# EAGLE board Leiterplatte (EAGLE 9.7.0)
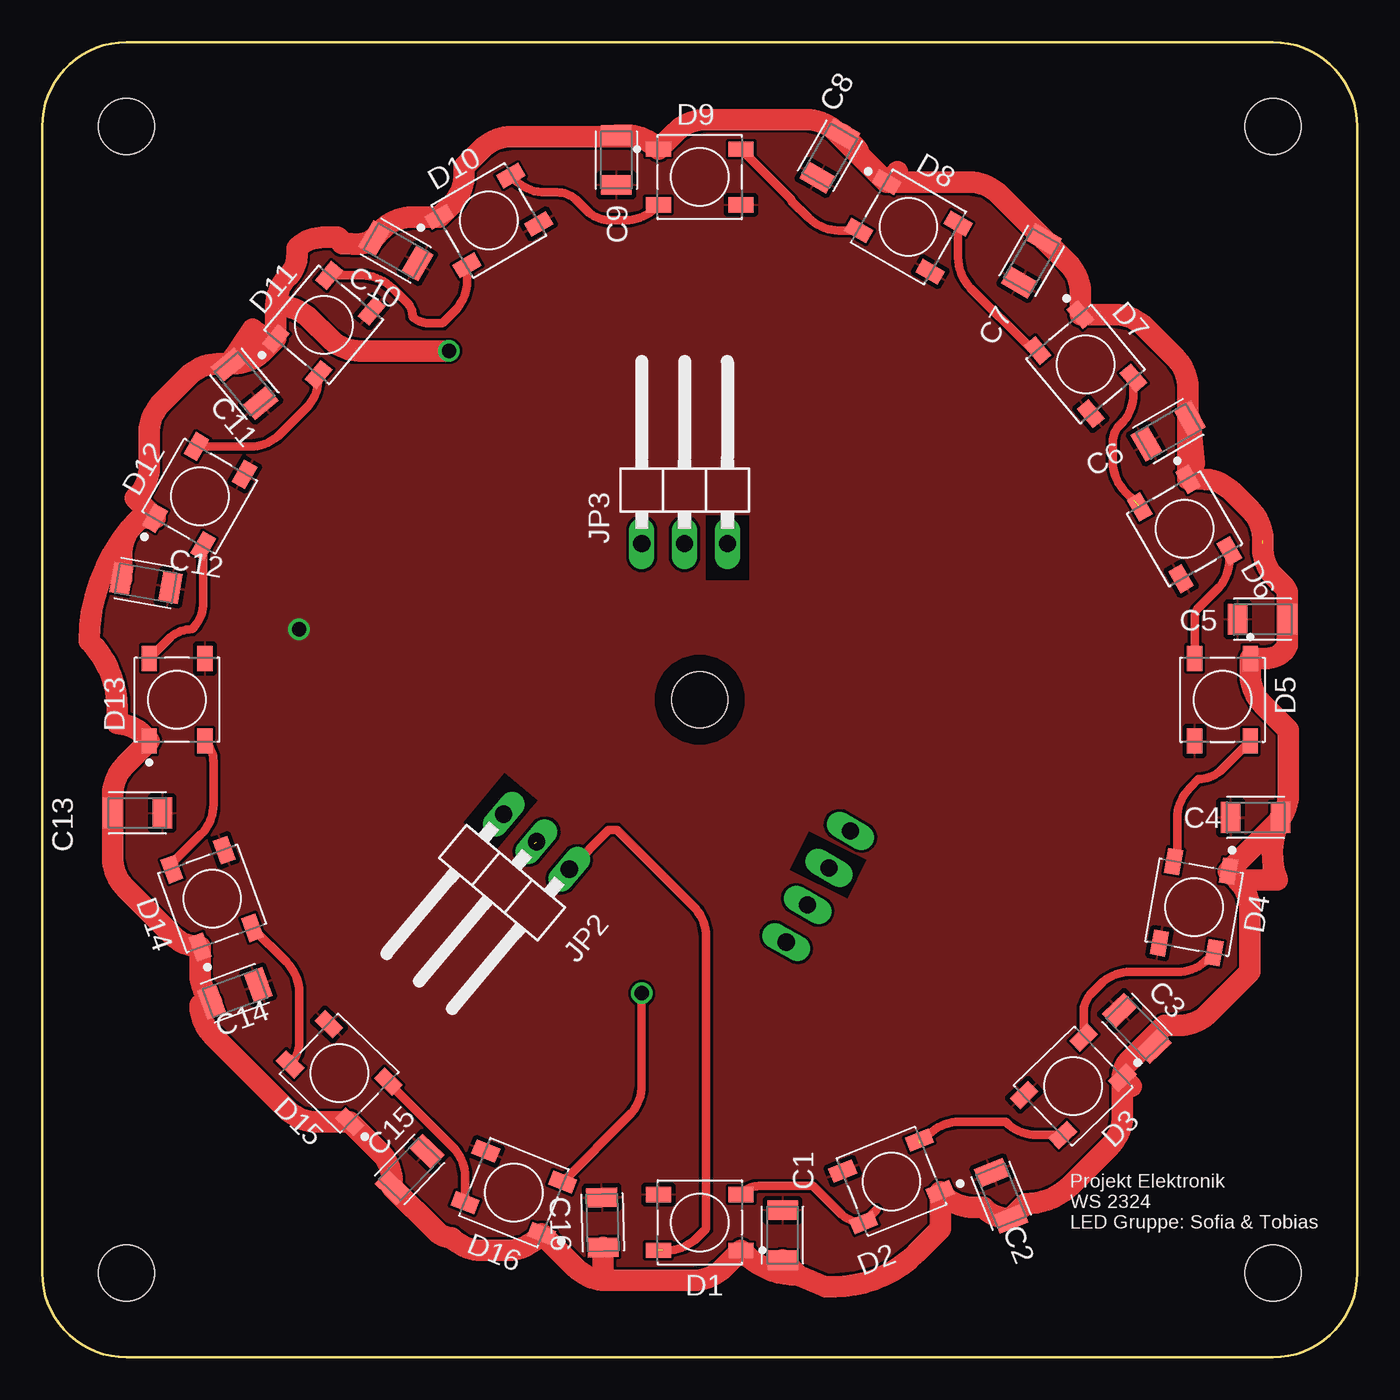
[diagram p0: board, top side]
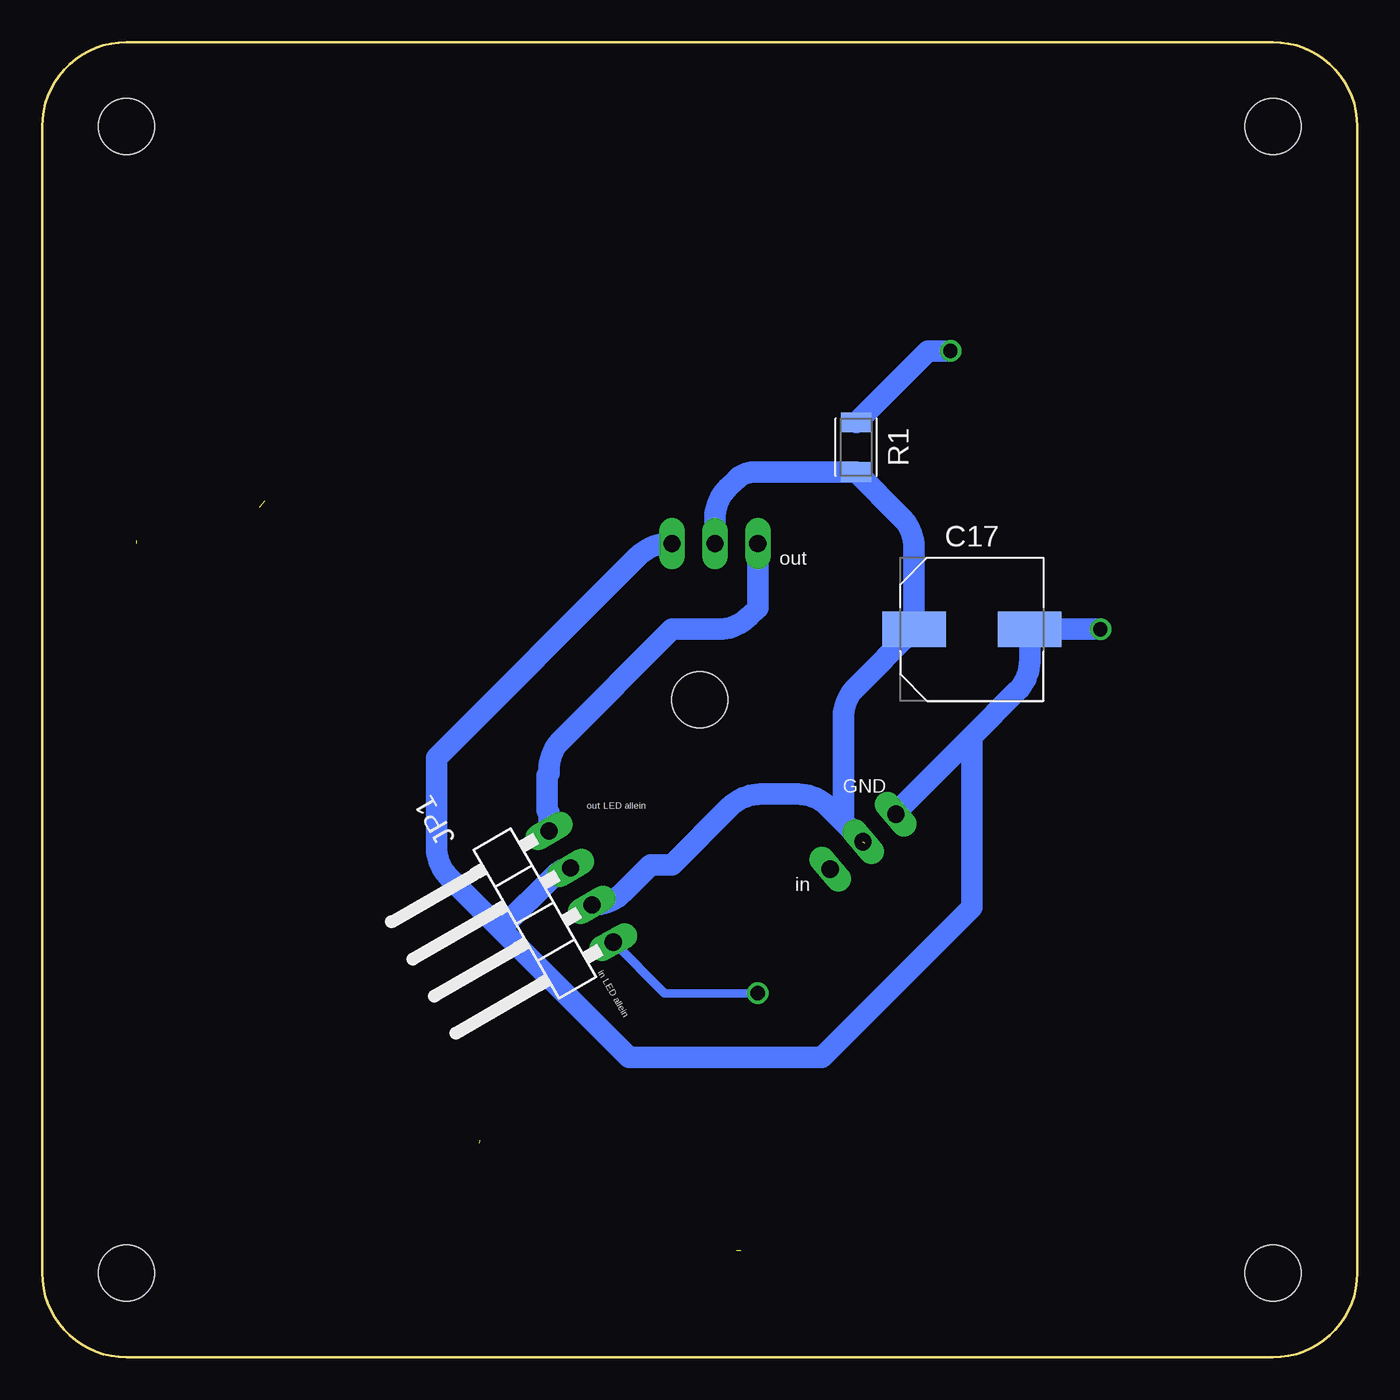
[diagram p1: board, bottom side, seen from below]

Size 78 x 78 mm. Coordinates in mm from the lower left corner, seen from the top.
Outline: 0,5 0,73 arc-90 5,78 73,78 arc-90 78,73 78,5 arc-90 73,0 5,0 arc-90 0,5
Copper layers (1*16): Top / Bottom
Stack-up Default Layer Stack: Top User Defined 0.035mm / Dielectric-1 User Defined 1.5mm / Bottom User Defined 0.035mm
Design rules: minimum drill size 0.35mm, minimum copper width 6mil, keepout clearance 0mil, drill distance 6mil, dimension clearance 40mil, restrict clearance 0mil, copper clearance wire_polygon to wire_polygon 6mil, copper clearance wire_polygon to pad_smd 6mil, copper clearance wire_polygon to via 6mil, copper clearance pad_smd to pad_smd 6mil, copper clearance pad_smd to via 6mil, copper clearance via to via 6mil, copper clearance smd to pad (same net) 6mil, copper clearance smd to via (same net) 6mil, copper clearance smd to smd (same net) 6mil
Holes 3.3 mm at 73,73 5,73 5,5 73,5 39,39
tRestrict: area 39.4,46.1 to 41.9,49.9; area 44.3,27.2 to 48.9,31.2; area 25,30.1 to 29.4,34.7

## Footprints (pad centres in the part's own frame; a part is rotated, then mirrored left to right if it is on the bottom)
CAPC3216X135 = smd 1.165 x 1.815: 1 -1.475,0; 2 1.475,0
CAPAE830X1050N = smd 3.764 x 2.115: 1 -3.426,0; 2 3.426,0
WS2812B = smd 1.5 x 0.9: 1 -2.45,1.65; 2 -2.45,-1.65; 3 2.45,-1.65; 4 2.45,1.65
1X04/90 = drill 1.016 long: 1 -3.81,-3.81; 2 -1.27,-3.81; 3 1.27,-3.81; 4 3.81,-3.81
1X03/90 = drill 1.016 long: 1 -2.54,-3.81; 2 0,-3.81; 3 2.54,-3.81
RESC3216X70 = smd 1.165 x 1.815: 1 -1.475,0; 2 1.475,0

## Placement (x,y rotation side)
C1  [CAPC3216X135]  43.91,7.25 270 top
C2  [CAPC3216X135]  56.88,9.59 292 top
C3  [CAPC3216X135]  64.93,19.51 314 top
C4  [CAPC3216X135]  71.96,32.02 0 top
C5  [CAPC3216X135]  72.38,43.77 0 top
C6  [CAPC3216X135]  66.79,54.93 30 top
C7  [CAPC3216X135]  58.67,65.02 60 top
C8  [CAPC3216X135]  46.72,71.26 60 top
C9  [CAPC3216X135]  34.05,71.01 90 top
C10  [CAPC3216X135]  20.98,65.63 150 top
C11  [CAPC3216X135]  12,57.74 310 top
C12  [CAPC3216X135]  6.16,45.92 350 top
C13  [CAPC3216X135]  5.65,32.28 0 top
C14  [CAPC3216X135]  11.43,21.59 20 top
C15  [CAPC3216X135]  21.78,11.15 46 top
C16  [CAPC3216X135]  33.23,8 91.6 top
C17  [CAPAE830X1050N]  22.86,43.18 0 bottom
D1  WS2812B  [WS2812B]  39,8 180 top
D2  WS2812B  [WS2812B]  50.37,10.43 202 top
D3  WS2812B  [WS2812B]  61.15,16.08 224 top
D4  WS2812B  [WS2812B]  68.31,26.7 260 top
D5  WS2812B  [WS2812B]  70,39 270 top
D6  WS2812B  [WS2812B]  67.75,49.13 300 top
D7  WS2812B  [WS2812B]  61.88,58.9 310 top
D8  WS2812B  [WS2812B]  51.38,67.04 330 top
D9  WS2812B  [WS2812B]  39,70 0 top
D10  WS2812B  [WS2812B]  26.49,67.43 30 top
D11  WS2812B  [WS2812B]  16.7,61.23 50 top
D12  WS2812B  [WS2812B]  9.35,51.07 60 top
D13  WS2812B  [WS2812B]  8,39 90 top
D14  WS2812B  [WS2812B]  10.08,27.21 110 top
D15  WS2812B  [WS2812B]  17.62,16.86 136 top
D16  WS2812B  [WS2812B]  27.97,9.78 158 top
JP1  PINHD-1X4/90  [1X04/90]  49.33,26.02 120 bottom
JP2  PINHD-1X3/90  [1X03/90]  26.87,27.66 140 top
JP3  PINHD-1X3/90  [1X03/90]  38.1,52.07 0 top
R1  [RESC3216X70]  29.72,53.98 270 bottom

## Library data of the parts
C1-C17 = Capacitor; CATEGORY: Capacitor
D1-D16 = LED; CATEGORY: LED; COLOR: RGB; DESCRIPTION: LED integrated light source; MANUFACTURER: Worldsemi; MPN: WS2812B; OPERATING_TEMP: -25 ℃ to +80℃(TJ); PART_STATUS: Active; SUB_CATEGORY: RGB
JP1 = Connector; CATEGORY: Headers; DESCRIPTION: Header, Right Angle, 4 Position; MANUFACTURER: Generic; MPN: Generic; OPERATING_TEMPERATURE: Generic; PART_STATUS: Active; PITCH: 0.100" (2.54mm); ROHS_COMPLIANCE: Generic; SERIES: Generic; SUB-CATEGORY: Headers, Male Pins; TYPE: Board to Board or Cable, Unshrouded, Through Hole, Right Angle
JP2 JP3 = Connector; CATEGORY: Headers; DESCRIPTION: Header, Right Angle, 3 Position; MANUFACTURER: Generic; MPN: Generic; OPERATING_TEMPERATURE: Generic; PART_STATUS: Active; PITCH: 0.100" (2.54mm); ROHS_COMPLIANCE: Generic; SERIES: Generic; SUB-CATEGORY: Headers, Male Pins; TYPE: Board to Board or Cable, Unshrouded, Through Hole, Right Angle
R1 = Resistor; CATEGORY: Resistor; SUB-CATEGORY: Fixed

## Nets
GND: C1.1 C2.1 C3.1 C4.1 C5.1 C6.1 C7.1 C8.1 C9.1 C10.1 C11.2 C12.2 C13.2 C14.2 C15.2 C16.2 C17.2 D1.3 D2.3 D3.3 D4.3 D5.3 D6.3 D7.3 D8.3 D9.3 D10.3 D11.3 D12.3 D13.3 D14.3 D15.3 D16.3 JP1.3 JP2.3 JP3.3
N$1: D14.2 D15.4
N$2: D15.2 D16.4
N$3: D16.2 JP1.1
N$4: C17.1 JP1.2 JP2.2 JP3.2 R1.2
N$5: D2.2 D3.4
N$6: D3.2 D4.4
N$7: D4.2 D5.4
N$8: D5.2 D6.4
N$9: D6.2 D7.4
N$10: D7.2 D8.4
N$11: D8.2 D9.4
N$12: D9.2 D10.4
N$13: D10.2 D11.4
N$14: D11.2 D12.4
N$15: D12.2 D13.4
N$16: D13.2 D14.4
N$17: D1.4 JP2.1
N$18: JP1.4 JP3.1
N$19: D1.2 D2.4
VDD: C1.2 C2.2 C3.2 C4.2 C5.2 C6.2 C7.2 C8.2 C9.2 C10.2 C11.1 C12.1 C13.1 C14.1 C15.1 C16.1 D1.1 D2.1 D3.1 D4.1 D5.1 D6.1 D7.1 D8.1 D9.1 D10.1 D11.1 D12.1 D13.1 D14.1 D15.1 D16.1 R1.1

## Tracks (layer width: path | path; a pad name or v marks a point on that pad's centre or on a via)
GND  (via drill 0.85)
  Bottom 1.27: v15.24,43.18 C17.2 19.43,41.31 arc45 20.18,39.51 22.86,36.83 | 22.86,36.83 27.3,32.39 arc-45 JP2.3 | 22.86,36.83 22.86,26.67 31.75,17.78 43.18,17.78 50.8,25.4 | 50.8,25.4 47.53,28.66 arc45 JP1.3 | JP3.3 40.86,48.26 arc-45 42.65,47.52 54.61,35.56 54.61,30.26 arc-45 53.87,28.47 50.8,25.4
  pour Top (rank 4): 0.46,77.27 0.46,1 74.59,1 77.54,3.95 77.54,74.35 74.62,77.27
N$1
  Top 0.508: D15.4 arc45 15.24,18.65 15.24,21.65 arc45 14.5,23.44 D14.2
N$2
  Top 0.508: D16.4 25.08,10.7 arc45 24.34,12.49 20.56,16.27 arc-45 D15.2
N$3  (via drill 0.85)
  Top 0.508: v35.56,21.59 35.56,16.14 arc-45 34.82,14.35 D16.2
  Bottom 0.508: JP1.1 41.09,21.59 v35.56,21.59
N$4  (1 unrouted)
  Bottom 1.27: 35.25,33.4 arc-45 35.25,33.4 | 35.25,33.4 35.4,33.4 arc-45 37.19,32.66 40.64,29.21 41.91,29.21 43.55,27.57 arc45 45.35,26.82 JP1.2 | 35.25,33.4 33.18,33.4 arc45 31.39,32.66 30.48,31.75 | 30.48,31.75 29.21,30.48 | 30.48,31.75 30.48,37.93 arc45 29.74,39.73 C17.1 26.29,48.02 arc-45 27.03,49.81 R1.2 35.79,52.5 arc-45 36.83,52.07 37.36,51.54 arc-45 38.1,49.75 JP3.2
N$5  (1 unrouted)
  Top 0.508: D3.4 58.98,13.19 arc-45 57.19,13.94 57.15,13.97 54.39,13.97 arc45 52.6,13.23 52.07,12.7
N$6
  Top 0.508: D4.4 69.11,23.6 arc-45 67.32,22.86 64.55,22.86 arc45 62.76,22.12 62.23,21.59 arc45 61.77,20.47 D3.2
N$7
  Top 0.508: D5.4 69.96,34.86 arc-45 68.58,34.29 68.05,33.76 arc45 67.31,31.97 67.31,29.88 arc-45 D4.2
N$8
  Top 0.508: D6.4 70.41,47.33 arc-45 69.66,45.53 68.58,44.45 arc45 68.35,43.9 D5.2
N$9  (1 unrouted)
  Top 0.508: D7.4 64.72,57.13 arc-45 63.98,55.34 63.88,55.24 arc45 63.5,54.33 63.5,53.12 arc45 64.24,51.33 64.77,50.8
N$10
  Top 0.508: D8.4 54.32,65.22 arc45 55.07,63.42 58.59,59.91 arc45 D7.2
N$11
  Top 0.508: D9.4 44.4,68.7 arc-45 44.45,68.58 45.45,67.58 arc45 47.25,66.83 D8.2
N$12
  Top 0.508: D10.4 28.04,69.83 arc45 29.84,69.09 30.52,69.09 arc-45 31.75,68.58 32.35,67.98 arc45 33.66,67.44 34.59,67.44 arc45 36.38,68.18 D9.2
N$13
  Top 0.508: D11.4 18.98,64.17 arc-45 20.78,63.42 21.61,62.59 arc-45 21.97,61.72 arc45 22.89,61.34 23.75,61.34 24.45,62.05 arc45 25.2,63.84 D10.2
N$14
  Top 0.508: D12.4 12.32,54.02 arc45 14.12,54.76 15.64,56.28 arc45 16.39,58.08 D11.2
N$15
  Top 0.508: D13.4 7.51,42.61 arc-45 8.89,43.18 arc45 9.55,44.78 D12.2
N$16
  Top 0.508: D14.4 arc-45 7.93,29.52 9.42,31.01 arc45 10.16,32.8 10.16,35.32 arc45 D13.2
N$17  (1 unrouted)
  Top 0.508: 36.83,6.35 37.05,6.35 arc45 38.84,7.09 39.37,7.62 39.37,24.95 arc45 38.63,26.75 34.08,31.29 33.6,31.29 JP2.1
N$18
  Bottom 1.27: JP3.1 35.56,44.45 36.09,43.92 arc45 37.88,43.18 40.64,43.18 47.19,36.63 arc-45 47.94,34.83 47.94,34.63 48.05,34.52 48.05,32.42 47.94,32.31 JP1.4
N$19
  Top 0.508: 49.47,8.74 D2.4 arc-45 47.31,8.57 45.72,10.16 42.51,10.16 arc45 41.48,9.73 arc45 D1.2
VDD  (via drill 0.85)  (1 unrouted)
  Top 0.508: D3.1 65.88,18.42 arc-45 C3.2
  Top 1.27: D11.1 13.86,62.34 | 13.86,62.34 arc-45 14.61,64.14 arc45 15.11,65.36 15.11,65.79 arc-45 16.65,66.42 17.53,66.42 17.69,66.26 arc-45 17.78,66.04 18.29,66.04 arc45 C10.2 20.16,66.89 arc-45 21.95,67.63 D10.1 24.27,68.36 arc45 25.02,70.16 25.02,70.61 26.05,71.65 arc-45 27.85,72.39 34.76,72.39 arc-45 D9.1 | C11.1 12.48,60.98 arc45 D11.1 | D9.1 37.56,72.66 arc-45 39.36,73.41 45.31,73.41 arc-45 47.11,72.66 48.45,71.31 | 48.45,71.31 D8.1 | D8.1 50.71,70.33 | D8.1 54.99,69.69 arc-45 56.78,68.95 59.44,66.29 | D6.1 67.96,57.48 arc45 67.21,59.28 65.4,61.09 arc45 63.6,61.84 D7.1 61.57,63.11 arc45 60.83,64.91 59.44,66.29 | D6.1 68.79,52.08 arc-45 70.58,51.34 71.65,50.27 arc-45 72.4,48.45 | C6.2 68.34,53 arc45 D6.1 | 70.88,28.3 D4.1 73.17,31.64 arc45 73.91,33.43 73.91,37.21 72.39,38.73 arc-45 71.65,40.53 D5.1 72.55,41.45 arc45 73.66,41.91 arc45 73.86,42.38 C5.2 73.86,45.25 arc45 73.66,45.72 73.13,46.25 arc-45 72.39,48.04 72.39,48.26 | 70.88,28.3 arc-45 71.63,26.51 71.63,22.86 69.2,20.43 arc-45 67.4,19.68 66.55,19.68 64.48,17.62 arc45 D3.1 | 70.88,28.3 73.24,28.3 arc-45 C4.2 | D3.1 64.58,16.07 | D3.1 64.06,14.31 arc-45 63.31,12.52 61.03,10.23 arc-45 58.33,9.11 C2.2 arc-45 55.81,8.89 55.24,8.89 arc-45 53.45,9.63 D2.1 53.26,7.62 51.84,6.21 arc-45 46.98,4.19 46.46,4.19 44.81,4.87 | 44.81,4.87 arc-45 41.59,6.21 D1.1 40.42,5.32 arc-45 38.62,4.57 33.43,4.57 | 33.43,4.57 arc-45 31.64,5.32 D16.1 29.39,7.09 arc-45 27.59,6.35 26.07,6.35 arc-45 24.27,7.09 arc-45 23.39,7.46 C15.1 20.76,10.39 arc45 20.02,12.19 D15.1 16.29,13.97 arc-45 14.49,14.71 10.11,19.1 arc-45 9.37,20.89
  Top 1.27: 5.81,49.77 arc45 2.8,42.49 arc-45 4.45,38.49 4.45,37.58 arc-45 5.94,36.96 D13.1 4.92,35.12 arc45 4.18,33.32 C13.1 4.18,29.64 arc45 4.92,27.84 7.75,25.01 arc45 D14.1 9.37,22.72 arc45 C14.1 | 5.81,49.77 D12.1 5.52,50.95 5.61,51.04 arc45 6.35,52.84 6.35,54.83 arc-45 7.09,56.62 8.65,58.18 arc-45 10.45,58.93 11.32,58.93 arc45 13.12,59.67 D11.1 | C16.1 33.27,4.96 arc45 33.43,4.57 | C1.2 44.81,4.87 | C12.1 4.71,47.62 arc-45 5.45,49.41 5.81,49.77 | C7.2 arc-45 59.44,66.29 | C8.2 48.3,71.7 arc-45 48.45,71.31 | C9.2 34.66,72.48 arc-45 36.46,71.74 D9.1 | 13.86,62.34 14.08,62.34 arc-45 15.88,61.59 17.04,60.43 arc45 18.83,59.69 v24.13,59.69
  Bottom 1.27: R1.1 25.48,59.69 v24.13,59.69

## Text on the board
tNames: Projekt Elektronik / WS 2324 / LED Gruppe: Sofia & Tobias
bNames: out | GND | out LED allein | in | in LED allein